# EAGLE board Gesture (EAGLE 7.2.0)
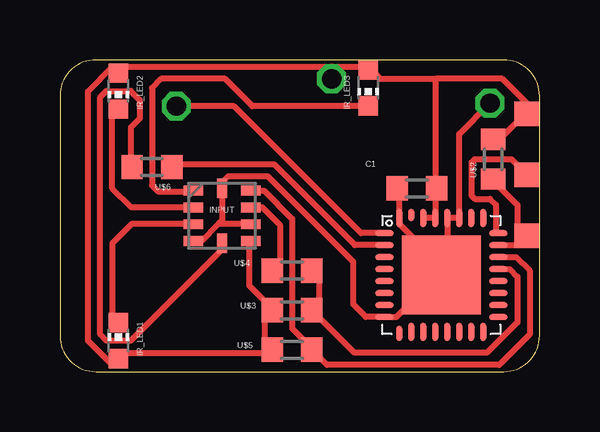
[diagram p0: board, top side]
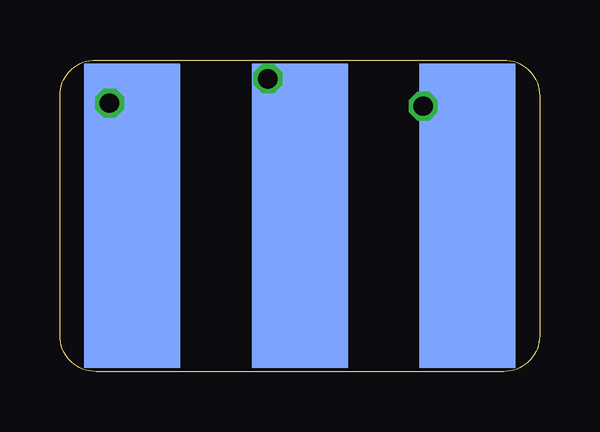
[diagram p1: board, bottom side, seen from below]

Size 20 x 13 mm. Coordinates in mm from the lower left corner, seen from the top.
Copper layers (1*16): Top 0.035mm / dielectric 1.5mm / Bottom 0.035mm
Design rules "Bilex DRU *": minimum track width 10mil, minimum drill 24mil, track to track 10mil, track to pad 10mil, pad to pad 10mil, via to via 10mil, smd to smd 10mil, copper to edge 1mil, drill to drill 8mil, minimum pad ring 10mil, minimum via ring 8mil, stop-mask expansion 4mil, vias tented up to drill 0mil, thermal gap 10mil

## Footprints (pad centres in the part's own frame; a part is rotated, then mirrored left to right if it is on the bottom)
603 = smd 0.889 x 1.016: 1 -0.826,0; 2 0.826,0
BH1771 = smd 0.813 x 0.406: 1 -1.2,1.05; 2 -1.2,0.35; 3 -1.2,-0.35; 4 -1.2,-1.05; 6 1.2,-1.05; 7 1.2,-0.35; 8 1.2,0.35; 9 1.2,1.05 | smd 0.406 x 0.813: 5 0,-1.15; 10 0,1.15
CHIP-LED0603 = smd 0.8 x 0.8: A 0,-0.75; C 0,0.75
CARRIER_SMD2_3POL = smd 4 x 12.7 bottom: GND -6.985,0; RX/TX 6.985,0; VCC 0,0 | smd 1.016 x 1.016: RST -9.461,0.826; TST -9.461,-1.714; VCC'' -9.461,-4.255
QFN32 = smd 0.762 x 0.254: 1 -2.375,1.75; 2 -2.375,1.25; 3 -2.375,0.75; 4 -2.375,0.25; 5 -2.375,-0.25; 6 -2.375,-0.75; 7 -2.375,-1.25; 8 -2.375,-1.75; 17 2.375,-1.75; 18 2.375,-1.25; 19 2.375,-0.75; 20 2.375,-0.25; 21 2.375,0.25; 22 2.375,0.75; 23 2.375,1.25; 24 2.375,1.75 | smd 0.254 x 0.635: 9 -1.75,-2.438 | smd 0.254 x 0.762: 10 -1.25,-2.375; 11 -0.75,-2.375; 12 -0.25,-2.375; 13 0.25,-2.375; 14 0.75,-2.375; 15 1.25,-2.375; 16 1.75,-2.375; 25 1.75,2.375; 26 1.25,2.375; 27 0.75,2.375; 28 0.25,2.375; 29 -0.25,2.375; 30 -0.75,2.375; 32 -1.75,2.375 | smd 0.254 x 0.508: 31 -1.25,2.5 | smd 3.302 x 3.302: TP 0,0

## Placement (x,y rotation side)
C1  100n  [603]  14.89,7.64 180 top
INPUT  BH1771  [BH1771]  6.76,6.5 0 top
IR_LED1  [CHIP-LED0603]  2.44,1.29 0 top
IR_LED2  [CHIP-LED0603]  2.44,11.7 180 top
IR_LED3  [CHIP-LED0603]  12.86,11.83 180 top
U$1  CARRIER_SMD2SMD2_3POL  [CARRIER_SMD2_3POL]  10,6.5 180 top
U$2  10k  [603]  18.06,8.86 90 top
U$3  4.7k  [603]  9.68,2.56 180 top
U$4  0  [603]  9.68,4.21 0 top
U$5  4.7k  [603]  9.68,0.91 180 top
U$6  0  [603]  3.84,8.53 180 top
U$10  MSP430G2553  [QFN32]  15.9,4.03 0 top

## Library data of the parts
C1 INPUT U$1-U$6 U$10 = thar
IR_LED1-IR_LED3 = led

## Nets
GND: C1.2 INPUT.4 INPUT.7 INPUT.10 U$1.GND U$10.8 U$10.27 U$10.28 U$10.32 U$10.TP
N$2: U$6.1 U$10.2
N$3: U$1.TST U$10.24
N$4: U$1.RST U$2.1 U$10.23
N$5: U$3.1 U$4.2 U$10.21
N$6: INPUT.5 U$6.2
N$12: U$1.RX/TX U$10.1
N$18: INPUT.9 U$5.1 U$10.22
N$19: INPUT.8 U$4.1
N$65: INPUT.1 IR_LED3.C
N$66: INPUT.2 IR_LED2.C
N$67: INPUT.3 IR_LED1.C
VCC: C1.1 INPUT.6 IR_LED1.A IR_LED2.A IR_LED3.A U$1.VCC U$1.VCC'' U$2.2 U$3.2 U$5.2 U$10.29 U$10.30

## Tracks (layer width: path | path; a pad name or v marks a point on that pad's centre or on a via)
GND  (via drill 0.8)
  Top 0.254: 16.43,4.35 16.19,5.38 16.16,5.35 | 16.43,4.35 16.48,3.06 U$10.TP 15.01,2.94 14.89,3.14 14.03,2.28 U$10.8 12.75,2.28 12.22,2.81 12.22,4.59 8.66,8.15 7.01,8.15 6.76,7.89 INPUT.10 6.76,6.3 6.6,6.15 | C1.2 14.25,7.58 14.12,7.46 14.15,7.49 U$10.32 14.15,6.16 14.76,5.55 15.52,5.35 16.15,4.72 | 16.15,4.72 U$10.28 U$10.27 16.65,9.91 v17.93,11.2 | 16.15,4.72 16.15,4.42 16.43,4.35 | INPUT.7 6.6,6.15 | INPUT.4 5.9,5.45 6.6,6.15
  Bottom 0.254: 18,6.5 17.93,6.57 v17.93,11.2 16.98,10.25 U$1.GND
N$2
  Top 0.254: U$6.1 4.66,8.59 4.73,8.66 8.92,8.66 12.29,5.28 U$10.2
N$3
  Top 0.254: 19.61,7.88 19.46,8.02 19.5,8.18 | U$10.24 18.19,5.78 18.19,6.95 17.93,7.21 17.3,7.21 17.17,7.33 17.17,8.73 17.3,8.86 18.82,8.86 19.5,8.18 | 19.5,8.18 U$1.TST
N$4
  Top 0.254: 19.46,5.48 19.5,5.38 | 19.46,5.48 19.5,5.69 | 19.5,5.69 19.08,5.74 19.08,6.95 18.06,7.97 U$2.1 | U$10.23 19.28,5.28 19.46,5.48 | 19.5,5.69 19.48,5.69 U$1.RST
N$5
  Top 0.254: U$10.21 18.75,4.28 19.08,3.96 19.08,2.05 17.81,0.78 12.28,0.78 U$3.1 10.82,2.56 10.82,3.89 U$4.2
N$6
  Top 0.254: INPUT.5 6.76,5.1 2.95,1.29 1.93,1.29 1.68,1.54 1.68,11.45 1.93,11.7 2.95,11.7 3.33,11.32 3.33,10.56 2.95,10.18 2.95,8.59 U$6.2
N$12  (via drill 0.8)
  Top 0.254: U$10.1 12.56,5.78 7.27,11.07 v4.85,11.07
  Bottom 0.254: U$1.RX/TX 3.01,10.12 v4.85,11.07
N$18
  Top 0.254: U$10.22 19.02,4.78 19.59,4.21 19.59,1.54 18.32,0.27 11.14,0.27 U$5.1 10.51,0.97 9.68,1.8 9.68,6.37 8.5,7.55 INPUT.9
N$19
  Top 0.254: INPUT.8 8.44,6.85 9.17,6.12 9.17,4.53 U$4.1
N$65
  Top 0.254: IR_LED3.C 13.11,11.07 8.03,11.07 6.89,12.21 4.22,12.21 3.84,11.83 3.84,7.77 4.09,7.51 5.53,7.51 INPUT.1
N$66
  Top 0.254: IR_LED2.C 2.2,10.95 2.19,10.94 2.19,7.64 2.98,6.85 INPUT.2
N$67
  Top 0.254: 2.2,2.04 IR_LED1.C 2.31,1.91 2.19,1.92 2.19,5.35 2.98,6.15 INPUT.3
VCC  (via drill 0.8)
  Top 0.254: U$10.29 | 15.65,12.21 15.65,8.02 | 15.65,8.02 U$10.29 | 15.65,7.77 15.59,8.02 | 15.59,8.02 15.65,8.02 | U$10.29 U$10.30 | C1.1 15.59,8.02 | 19.5,10.52 19.46,10.56 | U$2.2 18.12,9.48 19.2,10.56 19.2,10.51 19.46,10.56 | 19.65,10.75 19.65,11.01 18.44,12.21 15.65,12.21 | 19.65,10.75 19.46,10.56 | 11.33,12.72 2.44,12.72 IR_LED2.A 2.33,12.71 2.19,12.72 1.17,11.69 1.17,1.29 2.17,0.29 IR_LED1.A 2.44,0.78 8.73,0.78 U$5.2 8.54,1.23 8.54,2.56 | 11.33,12.72 12.86,12.72 | 12.84,12.72 IR_LED3.A 12.86,12.72 | 12.86,12.72 13.36,12.21 15.65,12.21 | U$3.2 8.54,2.56 | 8.54,2.56 8.54,2.94 7.9,3.58 7.9,5.39 INPUT.6 | U$1.VCC'' 19.65,10.76 19.65,10.75 | v11.33,12.21 11.33,12.72
  Bottom 0.254: U$1.VCC 10,12.53 10.19,12.72 v11.33,12.21 10,10.88 U$1.VCC